# Altium PCB PCB_proj_module_1_1.PcbDoc (part 2 of 9)
Units mm, origin at the board's own origin, x right, y up, seen from the top; angles counter-clockwise.
Board outline 413 x 280 mm, 4 copper layers (Top Layer, Signal Layer 1, Signal Layer 2, Bottom Layer), stack 0.778 mm thick; 1054 components, 639 nets, 3181 pads, 673 vias.
Unrouted connection lines stored in the file: 570.
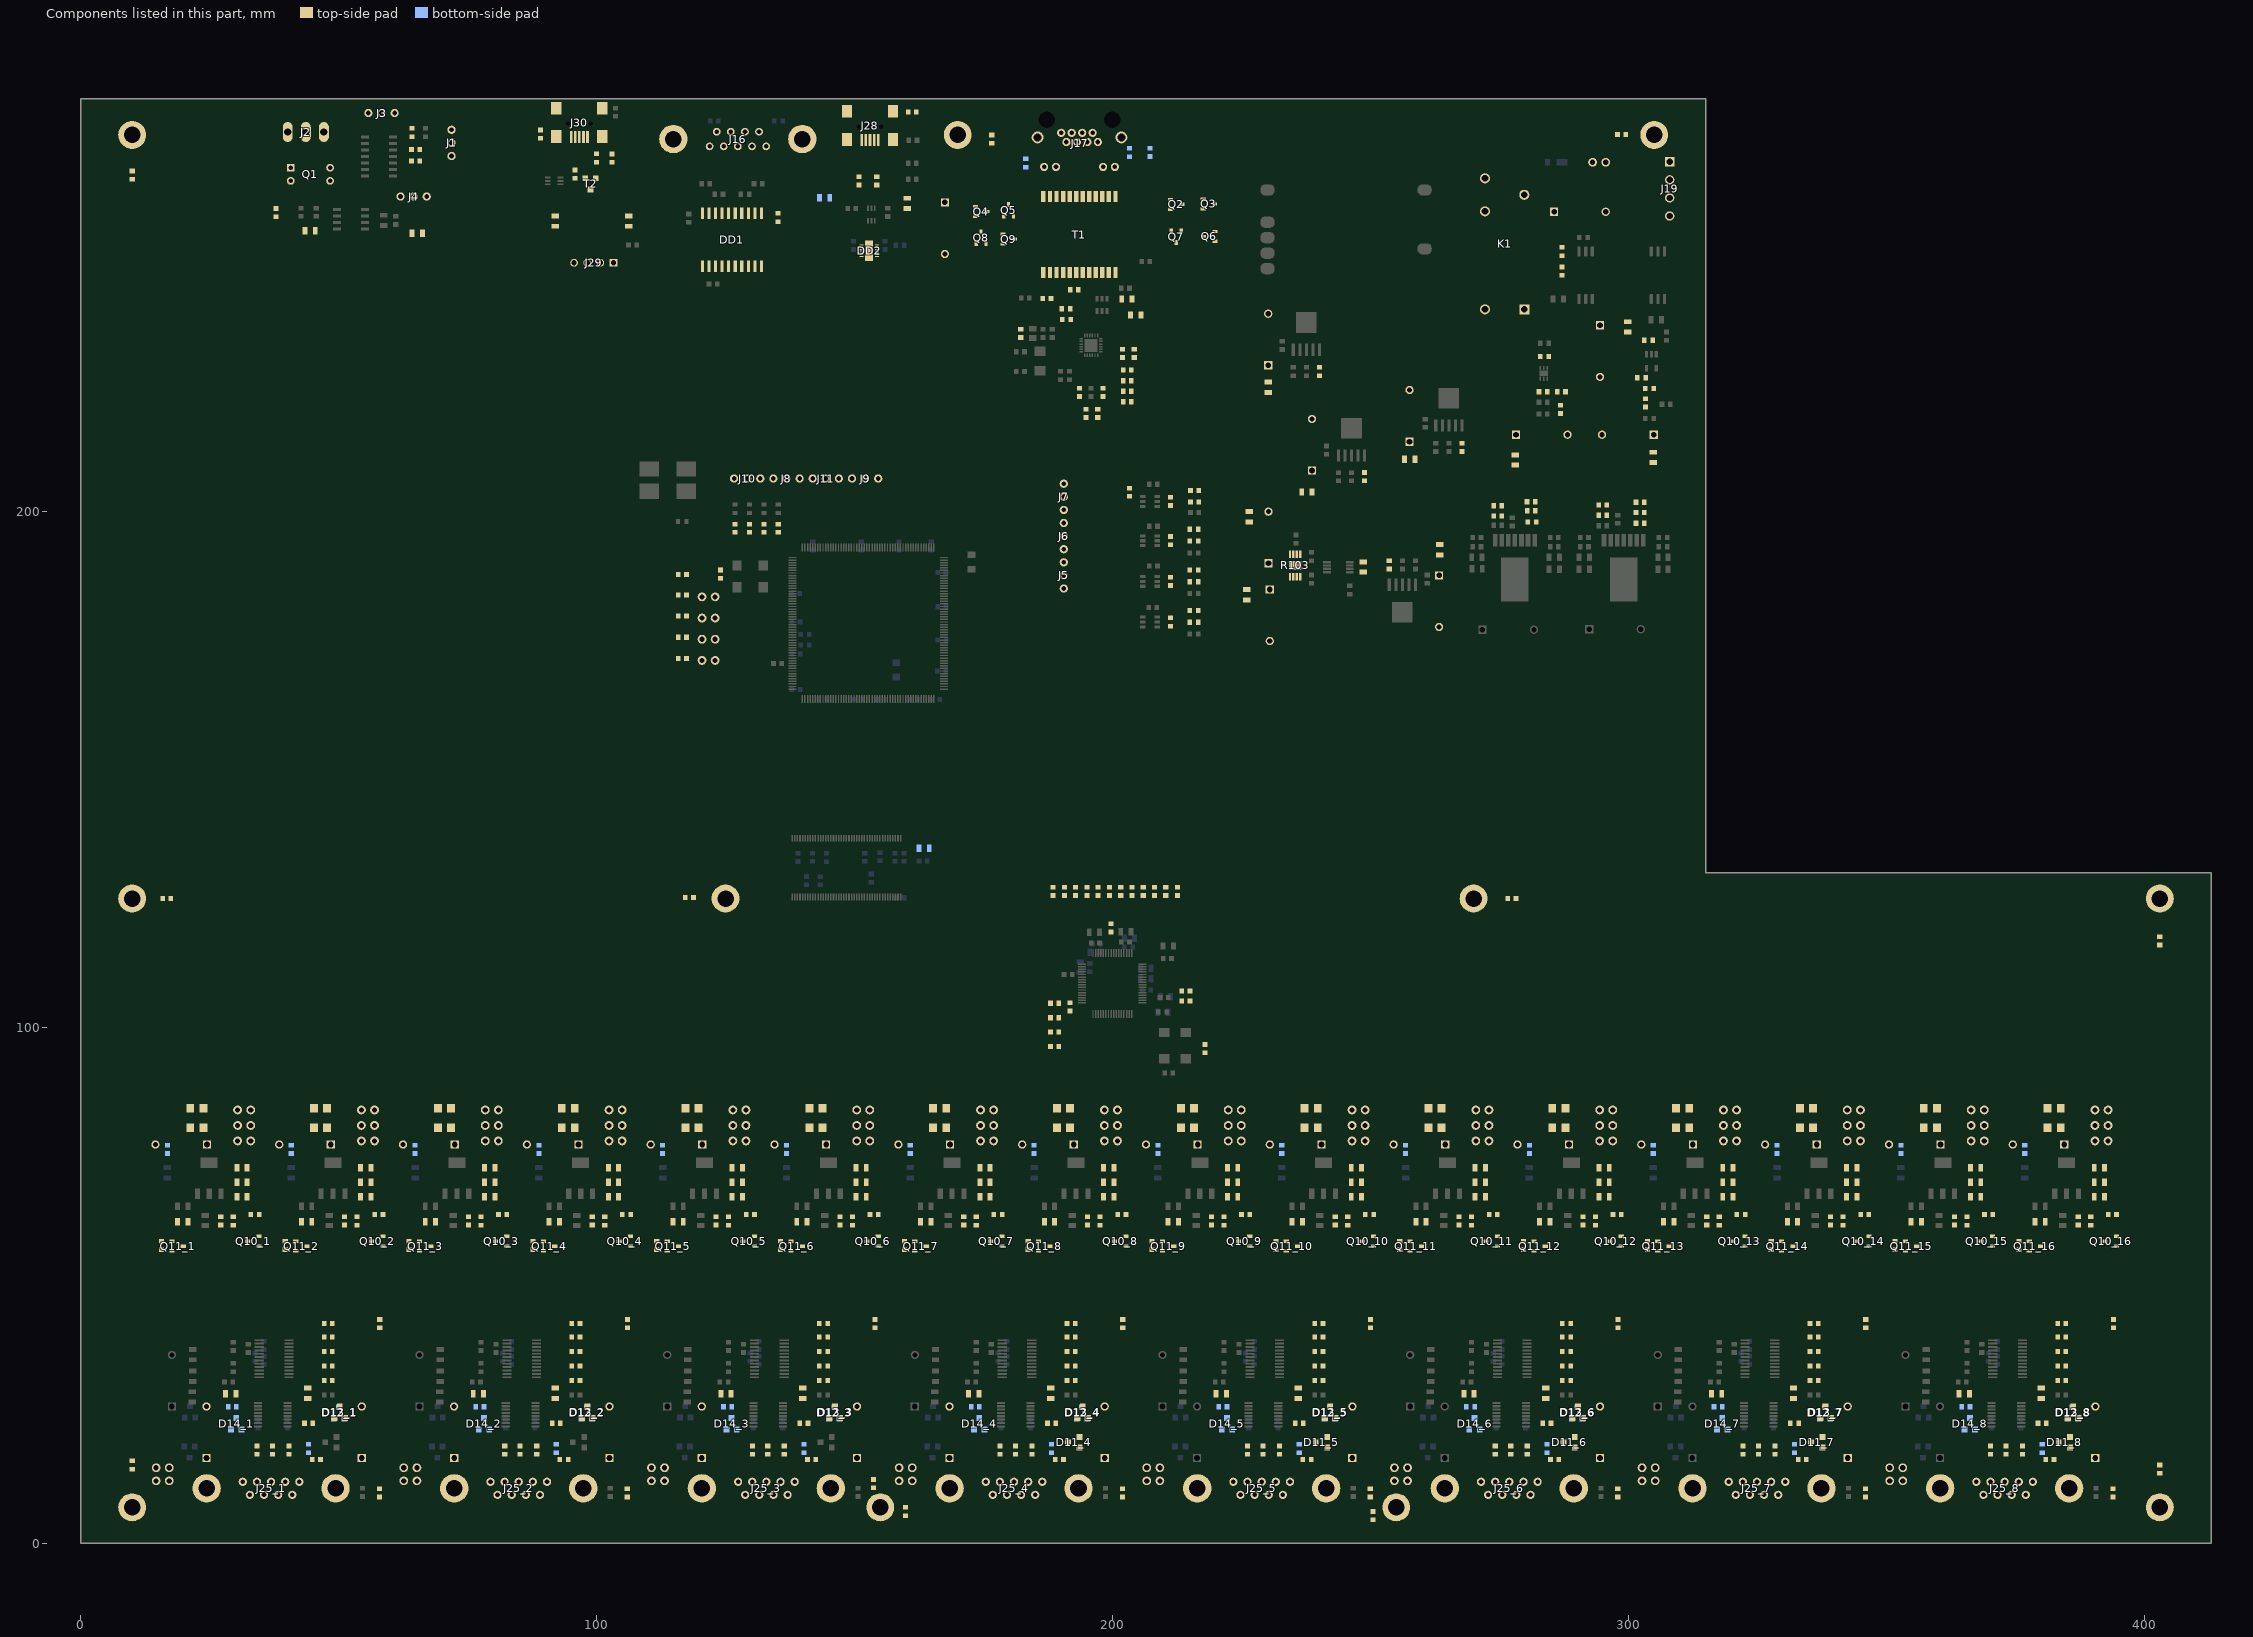
[diagram p4: the components of this part, seen from the top]

## Components (designator, comment, footprint, x,y, rotation, side; value= is the part's Value field where it differs from the comment) (continued)
D11_4 "MMBD1501A" SOT-23 193.61,18.584 r90 top (schematic designator D11)
D11_5 "MMBD1501A" SOT-23 241.61,18.584 r90 top (schematic designator D11)
D11_6 "MMBD1501A" SOT-23 289.61,18.584 r90 top (schematic designator D11)
D11_7 "MMBD1501A" SOT-23 337.61,18.584 r90 top (schematic designator D11)
D11_8 "MMBD1501A" SOT-23 385.61,18.584 r90 top (schematic designator D11)
D12_1 "MMBD1501A" SOT-23 51.116,24.19 r180 bottom (schematic designator D12)
D12_2 "MMBD1501A" SOT-23 99.116,24.19 r180 bottom (schematic designator D12)
D12_3 "MMBD1501A" SOT-23 147.116,24.19 r180 bottom (schematic designator D12)
D12_4 "MMBD1501A" SOT-23 195.116,24.19 r180 bottom (schematic designator D12)
D12_5 "MMBD1501A" SOT-23 243.116,24.19 r180 bottom (schematic designator D12)
D12_6 "MMBD1501A" SOT-23 291.116,24.19 r180 bottom (schematic designator D12)
D12_7 "MMBD1501A" SOT-23 339.116,24.19 r180 bottom (schematic designator D12)
D12_8 "MMBD1501A" SOT-23 387.116,24.19 r180 bottom (schematic designator D12)
D13_1 "MMBD1501A" SOT-23 49.211,24.317 r0 top (schematic designator D13)
D13_2 "MMBD1501A" SOT-23 97.211,24.317 r0 top (schematic designator D13)
D13_3 "MMBD1501A" SOT-23 145.211,24.317 r0 top (schematic designator D13)
D13_4 "MMBD1501A" SOT-23 193.211,24.317 r0 top (schematic designator D13)
D13_5 "MMBD1501A" SOT-23 241.211,24.317 r0 top (schematic designator D13)
D13_6 "MMBD1501A" SOT-23 289.211,24.317 r0 top (schematic designator D13)
D13_7 "MMBD1501A" SOT-23 337.211,24.317 r0 top (schematic designator D13)
D13_8 "MMBD1501A" SOT-23 385.211,24.317 r0 top (schematic designator D13)
D14_1 "MMBD1501A" SOT-23 31.2,22.1 r180 bottom (schematic designator D14)
D14_2 "MMBD1501A" SOT-23 79.2,22.1 r180 bottom (schematic designator D14)
D14_3 "MMBD1501A" SOT-23 127.2,22.1 r180 bottom (schematic designator D14)
D14_4 "MMBD1501A" SOT-23 175.2,22.1 r180 bottom (schematic designator D14)
D14_5 "MMBD1501A" SOT-23 223.2,22.1 r180 bottom (schematic designator D14)
D14_6 "MMBD1501A" SOT-23 271.2,22.1 r180 bottom (schematic designator D14)
D14_7 "MMBD1501A" SOT-23 319.2,22.1 r180 bottom (schematic designator D14)
D14_8 "MMBD1501A" SOT-23 367.2,22.1 r180 bottom (schematic designator D14)
DD1 "ADM3251SOICW20" SOIC127P1032X265-20N 126.246,252.681 r90 top
DD2 "FT234XD" DFN_12-045 152.835,250.572 r180 top
J1 "PLS3" COMATEL_385.0358.1.03.400 71.9,273.991 r270 top
J2 "15EDGRC-3.5-3P" 15EDGRC-3.5-3P-PAK 43.65,276.966 r270 top
J3 "PLS3" COMATEL_385.0358.1.03.400 60.865,277.241 r180 top
J4 "PLS3" COMATEL_385.0358.1.03.400 62.01,261.066 r0 top
J5 "PLS3" COMATEL_385.0358.1.03.400 190.572,185.08 r90 top
J6 "PLS3" COMATEL_385.0358.1.03.400 190.572,192.7 r90 top
J7 "PLS3" COMATEL_385.0358.1.03.400 190.572,200.32 r90 top
J8 "PLS3" COMATEL_385.0358.1.03.400 139.36,206.4 r180 top
J9 "PLS3" COMATEL_385.0358.1.03.400 154.6,206.4 r180 top
J10 "PLS3" COMATEL_385.0358.1.03.400 131.74,206.4 r180 top
J11 "PLS3" COMATEL_385.0358.1.03.400 146.98,206.4 r180 top
J12 "PLS2" SAMTEC_TSW-102-23-L-S 120.446,183.464 r0 top
J13 "PLS2" SAMTEC_TSW-102-23-L-S 120.446,179.359 r0 top
J14 "PLS2" SAMTEC_TSW-102-23-L-S 120.446,175.255 r0 top
J15 "PLS2" SAMTEC_TSW-102-23-L-S 120.446,171.15 r0 top
J16 "Family" TYCO_5747844-5 127.395,272.204 r0 top
J17 "Family" AMPHENOL_RJHSE-5381 193.615,272.514 r0 top
J18 "PLS2" SAMTEC_TSW-102-23-L-S 293.06,267.7 r0 top
J19 "15EDGRC-3.5-04P-14" TE_284512-4 308,262.55 r270 top
J21_1 "12V" SAMTEC_TSW-102-23-L-S 32.97,81.02 r180 top (schematic designator J21)
J21_2 "12V" SAMTEC_TSW-102-23-L-S 56.97,81.02 r180 top (schematic designator J21)
J21_3 "12V" SAMTEC_TSW-102-23-L-S 80.97,81.02 r180 top (schematic designator J21)
J21_4 "12V" SAMTEC_TSW-102-23-L-S 104.97,81.02 r180 top (schematic designator J21)
J21_5 "12V" SAMTEC_TSW-102-23-L-S 128.97,81.02 r180 top (schematic designator J21)
J21_6 "12V" SAMTEC_TSW-102-23-L-S 152.97,81.02 r180 top (schematic designator J21)
J21_7 "12V" SAMTEC_TSW-102-23-L-S 176.97,81.02 r180 top (schematic designator J21)
J21_8 "12V" SAMTEC_TSW-102-23-L-S 200.97,81.02 r180 top (schematic designator J21)
J21_9 "12V" SAMTEC_TSW-102-23-L-S 224.97,81.02 r180 top (schematic designator J21)
J21_10 "12V" SAMTEC_TSW-102-23-L-S 248.97,81.02 r180 top (schematic designator J21)
J21_11 "12V" SAMTEC_TSW-102-23-L-S 272.97,81.02 r180 top (schematic designator J21)
J21_12 "12V" SAMTEC_TSW-102-23-L-S 296.97,81.02 r180 top (schematic designator J21)
J21_13 "12V" SAMTEC_TSW-102-23-L-S 320.97,81.02 r180 top (schematic designator J21)
J21_14 "12V" SAMTEC_TSW-102-23-L-S 344.97,81.02 r180 top (schematic designator J21)
J21_15 "12V" SAMTEC_TSW-102-23-L-S 368.97,81.02 r180 top (schematic designator J21)
J21_16 "12V" SAMTEC_TSW-102-23-L-S 392.97,81.02 r180 top (schematic designator J21)
J22_1 "5V8" SAMTEC_TSW-102-23-L-S 32.97,78.02 r180 top (schematic designator J22)
J22_2 "5V8" SAMTEC_TSW-102-23-L-S 56.97,78.02 r180 top (schematic designator J22)
J22_3 "5V8" SAMTEC_TSW-102-23-L-S 80.97,78.02 r180 top (schematic designator J22)
J22_4 "5V8" SAMTEC_TSW-102-23-L-S 104.97,78.02 r180 top (schematic designator J22)
J22_5 "5V8" SAMTEC_TSW-102-23-L-S 128.97,78.02 r180 top (schematic designator J22)
J22_6 "5V8" SAMTEC_TSW-102-23-L-S 152.97,78.02 r180 top (schematic designator J22)
J22_7 "5V8" SAMTEC_TSW-102-23-L-S 176.97,78.02 r180 top (schematic designator J22)
J22_8 "5V8" SAMTEC_TSW-102-23-L-S 200.97,78.02 r180 top (schematic designator J22)
J22_9 "5V8" SAMTEC_TSW-102-23-L-S 224.97,78.02 r180 top (schematic designator J22)
J22_10 "5V8" SAMTEC_TSW-102-23-L-S 248.97,78.02 r180 top (schematic designator J22)
J22_11 "5V8" SAMTEC_TSW-102-23-L-S 272.97,78.02 r180 top (schematic designator J22)
J22_12 "5V8" SAMTEC_TSW-102-23-L-S 296.97,78.02 r180 top (schematic designator J22)
J22_13 "5V8" SAMTEC_TSW-102-23-L-S 320.97,78.02 r180 top (schematic designator J22)
J22_14 "5V8" SAMTEC_TSW-102-23-L-S 344.97,78.02 r180 top (schematic designator J22)
J22_15 "5V8" SAMTEC_TSW-102-23-L-S 368.97,78.02 r180 top (schematic designator J22)
J22_16 "5V8" SAMTEC_TSW-102-23-L-S 392.97,78.02 r180 top (schematic designator J22)
J24_1 "3V" SAMTEC_TSW-102-23-L-S 32.97,84.02 r180 top (schematic designator J24)
J24_2 "3V" SAMTEC_TSW-102-23-L-S 56.97,84.02 r180 top (schematic designator J24)
J24_3 "3V" SAMTEC_TSW-102-23-L-S 80.97,84.02 r180 top (schematic designator J24)
J24_4 "3V" SAMTEC_TSW-102-23-L-S 104.97,84.02 r180 top (schematic designator J24)
J24_5 "3V" SAMTEC_TSW-102-23-L-S 128.97,84.02 r180 top (schematic designator J24)
J24_6 "3V" SAMTEC_TSW-102-23-L-S 152.97,84.02 r180 top (schematic designator J24)
J24_7 "3V" SAMTEC_TSW-102-23-L-S 176.97,84.02 r180 top (schematic designator J24)
J24_8 "3V" SAMTEC_TSW-102-23-L-S 200.97,84.02 r180 top (schematic designator J24)
J24_9 "3V" SAMTEC_TSW-102-23-L-S 224.97,84.02 r180 top (schematic designator J24)
J24_10 "3V" SAMTEC_TSW-102-23-L-S 248.97,84.02 r180 top (schematic designator J24)
J24_11 "3V" SAMTEC_TSW-102-23-L-S 272.97,84.02 r180 top (schematic designator J24)
J24_12 "3V" SAMTEC_TSW-102-23-L-S 296.97,84.02 r180 top (schematic designator J24)
J24_13 "3V" SAMTEC_TSW-102-23-L-S 320.97,84.02 r180 top (schematic designator J24)
J24_14 "3V" SAMTEC_TSW-102-23-L-S 344.97,84.02 r180 top (schematic designator J24)
J24_15 "3V" SAMTEC_TSW-102-23-L-S 368.97,84.02 r180 top (schematic designator J24)
J24_16 "3V" SAMTEC_TSW-102-23-L-S 392.97,84.02 r180 top (schematic designator J24)
J25_1 "DBR-9M" AMPHENOL_L717DFE09P1ATN 36.922,10.686 r180 top (schematic designator J25)
J25_2 "DBR-9M" AMPHENOL_L717DFE09P1ATN 84.922,10.686 r180 top (schematic designator J25)
J25_3 "DBR-9M" AMPHENOL_L717DFE09P1ATN 132.922,10.686 r180 top (schematic designator J25)
J25_4 "DBR-9M" AMPHENOL_L717DFE09P1ATN 180.922,10.686 r180 top (schematic designator J25)
J25_5 "DBR-9M" AMPHENOL_L717DFE09P1ATN 228.922,10.686 r180 top (schematic designator J25)
J25_6 "DBR-9M" AMPHENOL_L717DFE09P1ATN 276.922,10.686 r180 top (schematic designator J25)
J25_7 "DBR-9M" AMPHENOL_L717DFE09P1ATN 324.922,10.686 r180 top (schematic designator J25)
J25_8 "DBR-9M" AMPHENOL_L717DFE09P1ATN 372.922,10.686 r180 top (schematic designator J25)
J26_1 "PLS2" SAMTEC_TSW-102-23-L-S 17.188,14.676 r270 top (schematic designator J26)
J26_2 "PLS2" SAMTEC_TSW-102-23-L-S 65.188,14.676 r270 top (schematic designator J26)
J26_3 "PLS2" SAMTEC_TSW-102-23-L-S 113.188,14.676 r270 top (schematic designator J26)
J26_4 "PLS2" SAMTEC_TSW-102-23-L-S 161.188,14.676 r270 top (schematic designator J26)
J26_5 "PLS2" SAMTEC_TSW-102-23-L-S 209.188,14.676 r270 top (schematic designator J26)
J26_6 "PLS2" SAMTEC_TSW-102-23-L-S 257.188,14.676 r270 top (schematic designator J26)
J26_7 "PLS2" SAMTEC_TSW-102-23-L-S 305.188,14.676 r270 top (schematic designator J26)
J26_8 "PLS2" SAMTEC_TSW-102-23-L-S 353.188,14.676 r270 top (schematic designator J26)
J27_1 "PLS2" SAMTEC_TSW-102-23-L-S 14.648,12.136 r90 top (schematic designator J27)
J27_2 "PLS2" SAMTEC_TSW-102-23-L-S 62.648,12.136 r90 top (schematic designator J27)
J27_3 "PLS2" SAMTEC_TSW-102-23-L-S 110.648,12.136 r90 top (schematic designator J27)
J27_4 "PLS2" SAMTEC_TSW-102-23-L-S 158.648,12.136 r90 top (schematic designator J27)
J27_5 "PLS2" SAMTEC_TSW-102-23-L-S 206.648,12.136 r90 top (schematic designator J27)
J27_6 "PLS2" SAMTEC_TSW-102-23-L-S 254.648,12.136 r90 top (schematic designator J27)
J27_7 "PLS2" SAMTEC_TSW-102-23-L-S 302.648,12.136 r90 top (schematic designator J27)
J27_8 "PLS2" SAMTEC_TSW-102-23-L-S 350.648,12.136 r90 top (schematic designator J27)
J28 "Разъем 1734035-1" TYCO_1734035-1 153,272 r180 top value=USB_mini
J29 "DS1021-1*4SF11-B" HDR_1X4_2R54_V_M 103.277,248.211 r180 top
J30 "USB_mini" TYCO_1734035-1 96.669,272.578 r180 top
K1 "G6RN-112DC" RELAY_G6RN-1_12DC 279.82,239.2 r90 top
L1 "BLM21" RESC2012X50N 65.25,253.966 r0 top value=1k
L2 "BLM21" RESC2012X50N 44.475,254.471 r0 top value=1k
L3 "BLM21" RESC2012X50N 160.225,259.72 r90 top value=1k
L4 "BLM21" RESC2012X50N 202.8,241.2 r180 top value=1k
L5 "BLM21" RESC2012X50N 204.5,238.1 r0 top value=1k
L7 "BLM21" RESC2012X50N 230.2,224.1 r270 top value=1k
L9 "BLM21" RESC2012X50N 257.6,210.1 r180 top value=1k
L10 "BLM21" RESC2012X50N 237.693,203.794 r180 top value=1k
L11 "BLM21" RESC2012X50N 248.599,189.251 r270 top value=1k
L12 "BLM21" RESC2012X50N 226,183.9 r270 top value=1k
L13 "BLM21" RESC2012X50N 278.1,210 r270 top value=1k
L14 "BLM21" RESC2012X50N 304.8,210.5 r270 top value=1k
L15 "BLM21" RESC2012X50N 263.4,192.6 r90 top value=1k
L16 "BLM21" RESC2012X50N 163.49,134.734 r180 bottom value=1k
L17 "BLM21" RESC2012X50N 106.2,256.3 r90 top value=1k
L18 "BLM21" RESC2012X50N 92,256.3 r270 top value=1k
L19_1 "BLM21" RESC2012X50N 31.288,70.02 r0 top value=1k (schematic designator L19)
L19_2 "BLM21" RESC2012X50N 55.288,70.02 r0 top value=1k (schematic designator L19)
L19_3 "BLM21" RESC2012X50N 79.288,70.02 r0 top value=1k (schematic designator L19)
L19_4 "BLM21" RESC2012X50N 103.288,70.02 r0 top value=1k (schematic designator L19)
L19_5 "BLM21" RESC2012X50N 127.288,70.02 r0 top value=1k (schematic designator L19)
L19_6 "BLM21" RESC2012X50N 151.288,70.02 r0 top value=1k (schematic designator L19)
L19_7 "BLM21" RESC2012X50N 175.288,70.02 r0 top value=1k (schematic designator L19)
L19_8 "BLM21" RESC2012X50N 199.288,70.02 r0 top value=1k (schematic designator L19)
L19_9 "BLM21" RESC2012X50N 223.288,70.02 r0 top value=1k (schematic designator L19)
L19_10 "BLM21" RESC2012X50N 247.288,70.02 r0 top value=1k (schematic designator L19)
L19_11 "BLM21" RESC2012X50N 271.288,70.02 r0 top value=1k (schematic designator L19)
L19_12 "BLM21" RESC2012X50N 295.288,70.02 r0 top value=1k (schematic designator L19)
L19_13 "BLM21" RESC2012X50N 319.288,70.02 r0 top value=1k (schematic designator L19)
L19_14 "BLM21" RESC2012X50N 343.288,70.02 r0 top value=1k (schematic designator L19)
L19_15 "BLM21" RESC2012X50N 367.288,70.02 r0 top value=1k (schematic designator L19)
L19_16 "BLM21" RESC2012X50N 391.288,70.02 r0 top value=1k (schematic designator L19)
L20_1 "BLM21" RESC2012X50N 31.288,72.814 r0 top value=1k (schematic designator L20)
L20_2 "BLM21" RESC2012X50N 55.288,72.814 r0 top value=1k (schematic designator L20)
L20_3 "BLM21" RESC2012X50N 79.288,72.814 r0 top value=1k (schematic designator L20)
L20_4 "BLM21" RESC2012X50N 103.288,72.814 r0 top value=1k (schematic designator L20)
L20_5 "BLM21" RESC2012X50N 127.288,72.814 r0 top value=1k (schematic designator L20)
L20_6 "BLM21" RESC2012X50N 151.288,72.814 r0 top value=1k (schematic designator L20)
L20_7 "BLM21" RESC2012X50N 175.288,72.814 r0 top value=1k (schematic designator L20)
L20_8 "BLM21" RESC2012X50N 199.288,72.814 r0 top value=1k (schematic designator L20)
L20_9 "BLM21" RESC2012X50N 223.288,72.814 r0 top value=1k (schematic designator L20)
L20_10 "BLM21" RESC2012X50N 247.288,72.814 r0 top value=1k (schematic designator L20)
L20_11 "BLM21" RESC2012X50N 271.288,72.814 r0 top value=1k (schematic designator L20)
L20_12 "BLM21" RESC2012X50N 295.288,72.814 r0 top value=1k (schematic designator L20)
L20_13 "BLM21" RESC2012X50N 319.288,72.814 r0 top value=1k (schematic designator L20)
L20_14 "BLM21" RESC2012X50N 343.288,72.814 r0 top value=1k (schematic designator L20)
L20_15 "BLM21" RESC2012X50N 367.288,72.814 r0 top value=1k (schematic designator L20)
L20_16 "BLM21" RESC2012X50N 391.288,72.814 r0 top value=1k (schematic designator L20)
L21_1 "BLM21" RESC2012X50N 31.288,67.226 r0 top value=1k (schematic designator L21)
L21_2 "BLM21" RESC2012X50N 55.288,67.226 r0 top value=1k (schematic designator L21)
L21_3 "BLM21" RESC2012X50N 79.288,67.226 r0 top value=1k (schematic designator L21)
L21_4 "BLM21" RESC2012X50N 103.288,67.226 r0 top value=1k (schematic designator L21)
L21_5 "BLM21" RESC2012X50N 127.288,67.226 r0 top value=1k (schematic designator L21)
L21_6 "BLM21" RESC2012X50N 151.288,67.226 r0 top value=1k (schematic designator L21)
L21_7 "BLM21" RESC2012X50N 175.288,67.226 r0 top value=1k (schematic designator L21)
L21_8 "BLM21" RESC2012X50N 199.288,67.226 r0 top value=1k (schematic designator L21)
L21_9 "BLM21" RESC2012X50N 223.288,67.226 r0 top value=1k (schematic designator L21)
L21_10 "BLM21" RESC2012X50N 247.288,67.226 r0 top value=1k (schematic designator L21)
L21_11 "BLM21" RESC2012X50N 271.288,67.226 r0 top value=1k (schematic designator L21)
L21_12 "BLM21" RESC2012X50N 295.288,67.226 r0 top value=1k (schematic designator L21)
L21_13 "BLM21" RESC2012X50N 319.288,67.226 r0 top value=1k (schematic designator L21)
L21_14 "BLM21" RESC2012X50N 343.288,67.226 r0 top value=1k (schematic designator L21)
L21_15 "BLM21" RESC2012X50N 367.288,67.226 r0 top value=1k (schematic designator L21)
L21_16 "BLM21" RESC2012X50N 391.288,67.226 r0 top value=1k (schematic designator L21)
L22 "BLM21" RESC2012X50N 226.5,199 r270 top value=1k
L24 "BLM21" RESC2012X50N 299.9,235.8 r270 top value=1k
L? "BLM21" RESC2012X50N 144.2,260.8 r180 bottom value=1k
M1 "M3" M3 10,273 r90 top
M2 "M3" M3 170,273 r90 top
M3 "M3" M3 155,7 r90 top
M4 "M3" M3 10,7 r90 top
M5 "M3" M3 403,7 r90 top
M6 "M3" M3 125,125 r90 top
M7 "M3" M3 270,125 r90 top
M8 "M3" M3 403,125 r90 top
M9 "M3" M3 305,273 r90 top
M10 "M3" M3 10,125 r0 top
M11 "M3" M3 255,7 r0 top
PoE1 "OSC_TP" TP2 167.525,259.926 r270 top
Q1 "LTV-817 (DIP-4)" DIP4-300 44.55,265.366 r0 top
Q2 "AO3407A" SOT95P229X119-3N 212.35,259.55 r0 top
Q3 "AO3407A" SOT95P229X119-3N 218.7,259.625 r0 top
Q4 "AO3407A" SOT95P229X119-3N 174.529,258.158 r0 top
Q5 "AO3407A" SOT95P229X119-3N 179.863,258.412 r90 top
Q6 "AO3404A" SOT95P229X119-3N 218.775,253.325 r180 top
Q7 "AO3404A" SOT95P229X119-3N 212.375,253.275 r270 top
Q8 "AO3404A" SOT95P229X119-3N 174.529,253.078 r90 top
Q9 "AO3404A" SOT95P229X119-3N 179.863,252.824 r0 top
Q10_1 "AO3401A" SOT95P229X119-3N 33.5,58.6 r180 top (schematic designator Q10)
Q10_2 "AO3401A" SOT95P229X119-3N 57.5,58.6 r180 top (schematic designator Q10)
Q10_3 "AO3401A" SOT95P229X119-3N 81.5,58.6 r180 top (schematic designator Q10)
Q10_4 "AO3401A" SOT95P229X119-3N 105.5,58.6 r180 top (schematic designator Q10)
Q10_5 "AO3401A" SOT95P229X119-3N 129.5,58.6 r180 top (schematic designator Q10)
Q10_6 "AO3401A" SOT95P229X119-3N 153.5,58.6 r180 top (schematic designator Q10)
Q10_7 "AO3401A" SOT95P229X119-3N 177.5,58.6 r180 top (schematic designator Q10)
Q10_8 "AO3401A" SOT95P229X119-3N 201.5,58.6 r180 top (schematic designator Q10)
Q10_9 "AO3401A" SOT95P229X119-3N 225.5,58.6 r180 top (schematic designator Q10)
Q10_10 "AO3401A" SOT95P229X119-3N 249.5,58.6 r180 top (schematic designator Q10)
Q10_11 "AO3401A" SOT95P229X119-3N 273.5,58.6 r180 top (schematic designator Q10)
Q10_12 "AO3401A" SOT95P229X119-3N 297.5,58.6 r180 top (schematic designator Q10)
Q10_13 "AO3401A" SOT95P229X119-3N 321.5,58.6 r180 top (schematic designator Q10)
Q10_14 "AO3401A" SOT95P229X119-3N 345.5,58.6 r180 top (schematic designator Q10)
Q10_15 "AO3401A" SOT95P229X119-3N 369.5,58.6 r180 top (schematic designator Q10)
Q10_16 "AO3401A" SOT95P229X119-3N 393.5,58.6 r180 top (schematic designator Q10)
Q11_1 "AO3400A" SOT95P229X119-3N 18.794,57.635 r0 top (schematic designator Q11)
Q11_2 "AO3400A" SOT95P229X119-3N 42.794,57.635 r0 top (schematic designator Q11)
Q11_3 "AO3400A" SOT95P229X119-3N 66.794,57.635 r0 top (schematic designator Q11)
Q11_4 "AO3400A" SOT95P229X119-3N 90.794,57.635 r0 top (schematic designator Q11)
Q11_5 "AO3400A" SOT95P229X119-3N 114.794,57.635 r0 top (schematic designator Q11)
Q11_6 "AO3400A" SOT95P229X119-3N 138.794,57.635 r0 top (schematic designator Q11)
Q11_7 "AO3400A" SOT95P229X119-3N 162.794,57.635 r0 top (schematic designator Q11)
Q11_8 "AO3400A" SOT95P229X119-3N 186.794,57.635 r0 top (schematic designator Q11)
Q11_9 "AO3400A" SOT95P229X119-3N 210.794,57.635 r0 top (schematic designator Q11)
Q11_10 "AO3400A" SOT95P229X119-3N 234.794,57.635 r0 top (schematic designator Q11)
Q11_11 "AO3400A" SOT95P229X119-3N 258.794,57.635 r0 top (schematic designator Q11)
Q11_12 "AO3400A" SOT95P229X119-3N 282.794,57.635 r0 top (schematic designator Q11)
Q11_13 "AO3400A" SOT95P229X119-3N 306.794,57.635 r0 top (schematic designator Q11)
Q11_14 "AO3400A" SOT95P229X119-3N 330.794,57.635 r0 top (schematic designator Q11)
Q11_15 "AO3400A" SOT95P229X119-3N 354.794,57.635 r0 top (schematic designator Q11)
Q11_16 "AO3400A" SOT95P229X119-3N 378.794,57.635 r0 top (schematic designator Q11)
R1_1 "RQ73C2B10RBTD 10" RC1206_0805 22.52,84.334 r0 top value=10 (schematic designator R1)
R1_2 "RQ73C2B10RBTD 10" RC1206_0805 46.52,84.334 r0 top value=10 (schematic designator R1)
R1_3 "RQ73C2B10RBTD 10" RC1206_0805 70.52,84.334 r0 top value=10 (schematic designator R1)
R1_4 "RQ73C2B10RBTD 10" RC1206_0805 94.52,84.334 r0 top value=10 (schematic designator R1)
R1_5 "RQ73C2B10RBTD 10" RC1206_0805 118.52,84.334 r0 top value=10 (schematic designator R1)
R1_6 "RQ73C2B10RBTD 10" RC1206_0805 142.52,84.334 r0 top value=10 (schematic designator R1)
R1_7 "RQ73C2B10RBTD 10" RC1206_0805 166.52,84.334 r0 top value=10 (schematic designator R1)
R1_8 "RQ73C2B10RBTD 10" RC1206_0805 190.52,84.334 r0 top value=10 (schematic designator R1)
R1_9 "RQ73C2B10RBTD 10" RC1206_0805 214.52,84.334 r0 top value=10 (schematic designator R1)
R1_10 "RQ73C2B10RBTD 10" RC1206_0805 238.52,84.334 r0 top value=10 (schematic designator R1)
R1_11 "RQ73C2B10RBTD 10" RC1206_0805 262.52,84.334 r0 top value=10 (schematic designator R1)
R1_12 "RQ73C2B10RBTD 10" RC1206_0805 286.52,84.334 r0 top value=10 (schematic designator R1)
R1_13 "RQ73C2B10RBTD 10" RC1206_0805 310.52,84.334 r0 top value=10 (schematic designator R1)
R1_14 "RQ73C2B10RBTD 10" RC1206_0805 334.52,84.334 r0 top value=10 (schematic designator R1)
R1_15 "RQ73C2B10RBTD 10" RC1206_0805 358.52,84.334 r0 top value=10 (schematic designator R1)
R1_16 "RQ73C2B10RBTD 10" RC1206_0805 382.52,84.334 r0 top value=10 (schematic designator R1)
R2_1 "RQ73C2B10RBTD 10" RC1206_0805 22.52,80.584 r0 top value=10 (schematic designator R2)
R2_2 "RQ73C2B10RBTD 10" RC1206_0805 46.52,80.584 r0 top value=10 (schematic designator R2)
R2_3 "RQ73C2B10RBTD 10" RC1206_0805 70.52,80.584 r0 top value=10 (schematic designator R2)
R2_4 "RQ73C2B10RBTD 10" RC1206_0805 94.52,80.584 r0 top value=10 (schematic designator R2)
R2_5 "RQ73C2B10RBTD 10" RC1206_0805 118.52,80.584 r0 top value=10 (schematic designator R2)
R2_6 "RQ73C2B10RBTD 10" RC1206_0805 142.52,80.584 r0 top value=10 (schematic designator R2)
R2_7 "RQ73C2B10RBTD 10" RC1206_0805 166.52,80.584 r0 top value=10 (schematic designator R2)
R2_8 "RQ73C2B10RBTD 10" RC1206_0805 190.52,80.584 r0 top value=10 (schematic designator R2)
R2_9 "RQ73C2B10RBTD 10" RC1206_0805 214.52,80.584 r0 top value=10 (schematic designator R2)
R2_10 "RQ73C2B10RBTD 10" RC1206_0805 238.52,80.584 r0 top value=10 (schematic designator R2)
R2_11 "RQ73C2B10RBTD 10" RC1206_0805 262.52,80.584 r0 top value=10 (schematic designator R2)
R2_12 "RQ73C2B10RBTD 10" RC1206_0805 286.52,80.584 r0 top value=10 (schematic designator R2)
R2_13 "RQ73C2B10RBTD 10" RC1206_0805 310.52,80.584 r0 top value=10 (schematic designator R2)
R2_14 "RQ73C2B10RBTD 10" RC1206_0805 334.52,80.584 r0 top value=10 (schematic designator R2)
R2_15 "RQ73C2B10RBTD 10" RC1206_0805 358.52,80.584 r0 top value=10 (schematic designator R2)
R2_16 "RQ73C2B10RBTD 10" RC1206_0805 382.52,80.584 r0 top value=10 (schematic designator R2)
R3_1 "RQ73C2A49K9BTD 49K9" RESC2012X50N 19.8,62.4 r0 top value=49K9 (schematic designator R3)
R3_2 "RQ73C2A49K9BTD 49K9" RESC2012X50N 43.8,62.4 r0 top value=49K9 (schematic designator R3)
R3_3 "RQ73C2A49K9BTD 49K9" RESC2012X50N 67.8,62.4 r0 top value=49K9 (schematic designator R3)
R3_4 "RQ73C2A49K9BTD 49K9" RESC2012X50N 91.8,62.4 r0 top value=49K9 (schematic designator R3)
R3_5 "RQ73C2A49K9BTD 49K9" RESC2012X50N 115.8,62.4 r0 top value=49K9 (schematic designator R3)
R3_6 "RQ73C2A49K9BTD 49K9" RESC2012X50N 139.8,62.4 r0 top value=49K9 (schematic designator R3)
R3_7 "RQ73C2A49K9BTD 49K9" RESC2012X50N 163.8,62.4 r0 top value=49K9 (schematic designator R3)
R3_8 "RQ73C2A49K9BTD 49K9" RESC2012X50N 187.8,62.4 r0 top value=49K9 (schematic designator R3)
R3_9 "RQ73C2A49K9BTD 49K9" RESC2012X50N 211.8,62.4 r0 top value=49K9 (schematic designator R3)
R3_10 "RQ73C2A49K9BTD 49K9" RESC2012X50N 235.8,62.4 r0 top value=49K9 (schematic designator R3)
R3_11 "RQ73C2A49K9BTD 49K9" RESC2012X50N 259.8,62.4 r0 top value=49K9 (schematic designator R3)
R3_12 "RQ73C2A49K9BTD 49K9" RESC2012X50N 283.8,62.4 r0 top value=49K9 (schematic designator R3)
R3_13 "RQ73C2A49K9BTD 49K9" RESC2012X50N 307.8,62.4 r0 top value=49K9 (schematic designator R3)
R3_14 "RQ73C2A49K9BTD 49K9" RESC2012X50N 331.8,62.4 r0 top value=49K9 (schematic designator R3)
R3_15 "RQ73C2A49K9BTD 49K9" RESC2012X50N 355.8,62.4 r0 top value=49K9 (schematic designator R3)
R3_16 "RQ73C2A49K9BTD 49K9" RESC2012X50N 379.8,62.4 r0 top value=49K9 (schematic designator R3)
R4 "1K SMD0603" 0603R 188.8,96.3 r180 top value=1K
R5 "1K SMD0603" 0603R 188.8,99.1 r180 top value=1K
R6 "1K SMD0603" 0603R 188.8,101.9 r180 top value=1K
R7 "1K SMD0603" 0603R 199.7,119.3 r90 top value=1K
R8 "1K SMD0603" 0603R 191.8,104 r270 top value=1K
R9 "1K SMD0603" 0603R 188.8,104.7 r180 top value=1K
R10 "1K SMD0603" 0603R 214.225,105.125 r0 top value=1K
R11 "1K SMD0603" 0603R 214.218,107.063 r0 top value=1K
R12 "1K SMD0603" 0603R 203.773,126.4 r90 top value=1K
R13 "1K SMD0603" 0603R 201.591,126.4 r90 top value=1K
R14 "1K SMD0603" 0603R 199.409,126.4 r90 top value=1K
R15 "1K SMD0603" 0603R 197.227,126.4 r90 top value=1K
R16 "1K SMD0603" 0603R 195.045,126.4 r90 top value=1K
R17 "1K SMD0603" 0603R 192.864,126.4 r90 top value=1K
R18 "1K SMD0603" 0603R 217.941,95.912 r90 top value=1K
R19 "1K SMD0603" 0603R 190.682,126.4 r90 top value=1K
R20 "1K SMD0603" 0603R 188.5,126.4 r90 top value=1K
R21 "1K SMD0603" 0603R 205.955,126.4 r90 top value=1K
R22 "1K SMD0603" 0603R 208.136,126.4 r90 top value=1K
R23 "1K SMD0603" 0603R 210.318,126.4 r90 top value=1K
R24 "1K SMD0603" 0603R 212.6,126.4 r90 top value=1K
R25 "8K2 SMD0603" 0603R 37.9,257.946 r270 top value=8K2
R26 "8K2 SMD0603" 0603R 64.25,273.466 r270 top value=8K2
R27 "10K SMD0603" 0603R 64.95,267.966 r0 top value=10K
R28 "10K SMD0603" 0603R 64.95,270.166 r0 top value=10K
R29 "10K SMD0603" 0603R 116.65,187.775 r180 top value=10K
R30 "100K SMD0603" 0603R 203.311,203.738 r90 top value=100K
R31 "100K SMD0603" 0603R 211.236,201.97 r270 top value=100K
R32 "8K2 SMD0603" 0603R 124.05,187.875 r90 top value=8K2
R33 "43K SMD0603" 0603R 215.936,204.063 r0 top value=43K
R34 "1K SMD0603" 0603R 135.237,196.775 r270 top value=1K
R35 "1K SMD0603" 0603R 132.443,196.775 r270 top value=1K
R36 "4K3 SMD0603" 0603R 215.936,201.888 r180 top value=4K3
R37 "1K SMD0603" 0603R 129.649,196.775 r270 top value=1K
R38 "1K SMD0603" 0603R 126.855,196.775 r270 top value=1K
R39 "1K SMD0603" 0603R 211.236,194.363 r270 top value=1K
R40 "30K SMD0603" 0603R 215.812,196.57 r0 top value=30K
R41 "1K SMD0603" 0603R 116.65,183.84 r180 top value=1K
R42 "4K3 SMD0603" 0603R 215.812,194.284 r180 top value=4K3
R43 "1K SMD0603" 0603R 211.236,186.476 r270 top value=1K
R44 "1K SMD0603" 0603R 116.65,179.736 r180 top value=1K
R45 "30K SMD0603" 0603R 215.812,188.696 r0 top value=30K
R46 "4K3 SMD0603" 0603R 215.812,186.41 r180 top value=4K3
R47 "1K SMD0603" 0603R 116.65,175.631 r180 top value=1K
R48 "1K SMD0603" 0603R 211.236,178.602 r270 top value=1K
R49 "30K SMD0603" 0603R 215.812,180.822 r0 top value=30K
R50 "1K SMD0603" 0603R 116.65,171.526 r180 top value=1K
R51 "4K3 SMD0603" 0603R 215.812,178.536 r180 top value=4K3
R52 "100nF SMD0603" 0603C 150.867,264.108 r90 top value=100nF
R53 "100nF SMD0603" 0603C 154.3,264.1 r90 top value=100nF
R54 "1K SMD0603" 0603R 118,125.2 r0 top value=1K
R55 "100nF SMD0603" 0603C 135.2,257 r270 top value=100nF
R56 "100nF SMD0603" 0603C 161.204,277.473 r180 top value=100nF
R57 "1K SMD0603" 0603R 202.857,225.364 r0 top value=1K
R58 "1K SMD0603" 0603R 202.857,223.332 r0 top value=1K
R59 "1K SMD0603" 0603R 202.857,221.3 r0 top value=1K
R60 "1К SMD0603" 0603R 191,239.3 r180 top value=1К
R61 "1К SMD0603" 0603R 192.6,243 r0 top value=1К
R62 "1К SMD0603" 0603R 191.1,237.2 r180 top value=1К
R63 "1К SMD0603" 0603R 187.3,241.3 r180 top value=1К
R64 "33 SMD0603" 0603R 194.851,219.042 r90 top value=33
R65 "33 SMD0603" 0603R 193.579,223.106 r90 top value=33
R66 "10K SMD0603" 0603R 197.136,219.042 r90 top value=10K
R67 "33 SMD0603" 0603R 198.151,223.106 r90 top value=33
R68 "100nF SMD0603" 0603C 182.225,234.536 r270 top value=100nF
R69 "1K5" 0603R 202.857,227.424 r0 top
R70 "10K SMD0603" 0603R 204.223,230.672 r90 top value=10K
R71 "33 SMD0603" 0603R 201.937,230.672 r90 top value=33
R72 "100nF SMD0603" 0603C 203.269,269.588 r270 bottom value=100nF
R73 "100nF SMD0603" 0603C 207.25,269.625 r270 bottom value=100nF
R74 "100nF SMD0603" 0603C 183.203,267.556 r270 bottom value=100nF
R75 "1K SMD0603" 0603R 281.306,198.004 r0 top value=1K
R76 "8K2 SMD0603" 0603R 281.175,200.15 r180 top value=8K2
R77 "51K SMD0603" 0603R 274.668,199.122 r0 top value=51K
R78 "2K2 SMD0603" 0603R 281.15,201.9 r180 top value=2K2
R79 "8K2 SMD0603" 0603R 274.668,201.12 r0 top value=8K2
R80 "100K SMD0603" 0603R 287.1,246.6 r270 top value=100K
R81 "51K SMD0603" 0603R 287.1,250.4 r270 top value=51K
R82 "1K SMD0603" 0603R 10,265.2 r90 top value=1K
R83 "1K SMD0603" 0603R 277.4,125 r180 top value=1K
R84 "1K SMD0603" 0603R 176.6,272.2 r90 top value=1K
R85 "1K SMD0603" 0603R 240.133,227.148 r90 top value=1K
R86 "1K SMD0603" 0603R 403,116.8 r90 top value=1K
R87 "1K SMD0603" 0603R 159.9,6.2 r90 top value=1K
R88 "1K SMD0603" 0603R 298.7,273.1 r0 top value=1K
R89 "1K SMD0603" 0603R 10,15.2 r270 top value=1K
R90 "1K SMD0603" 0603R 267.731,212.448 r90 top value=1K
R91 "1K SMD0603" 0603R 403,14.4 r270 top value=1K
R92 "1K SMD0603" 0603R 16.7,125 r180 top value=1K
R93 "1K SMD0603" 0603R 302.268,197.75 r0 top value=1K
R94 "8K2 SMD0603" 0603R 302.275,199.8 r180 top value=8K2
R95 "24K SMD0603" 0603R 295.018,199.274 r0 top value=24K
R96 "2K2 SMD0603" 0603R 302.275,201.8 r180 top value=2K2
R97 "8K2 SMD0603" 0603R 295.018,201.306 r0 top value=8K2
R98 "1K SMD0603" 0603R 248.869,206.786 r90 top value=1K
R99 "1K2 SMD0603" 0603R 286.999,223.236 r180 top value=1K2
R100 "1K SMD0603" 0603R 286.844,219.808 r270 top value=1K
R101 "1K SMD0603" 0603R 283.735,230.078 r0 top value=1K
R102 "6K8 SMD0603" 0603R 283.481,223.236 r180 top value=6K8
R103 "LT5400-6" SOP65P488X110-9N-R178X241 235.396,189.565 r270 top value=-6
R104 "1K SMD0603" 0603R 303.9,233.2 r180 top value=1K
R105 "6K8 SMD0603" 0603R 304.092,223.854 r0 top value=6K8
R106 "1K SMD0603" 0603R 303.33,221.06 r270 top value=1K
R107 "1K2 SMD0603" 0603R 302.544,225.941 r0 top value=1K2
R108 "1K SMD0603" 0603R 253.656,189.664 r270 top value=1K
R109 "1K SMD0603" 0603R 103,268.5 r90 top value=1K
R110 "1K SMD0603" 0603R 100.025,268.525 r270 top value=1K
R111 "1K SMD0603" 0603R 95.8,265.4 r270 top value=1K
R112 "1K SMD0603" 0603R 89.161,273.16 r270 top value=1K
R113_1 "1K SMD0603" 0603R 27.18,62.52 r270 top value=1K (schematic designator R113)
R113_2 "1K SMD0603" 0603R 51.18,62.52 r270 top value=1K (schematic designator R113)
R113_3 "1K SMD0603" 0603R 75.18,62.52 r270 top value=1K (schematic designator R113)
R113_4 "1K SMD0603" 0603R 99.18,62.52 r270 top value=1K (schematic designator R113)
R113_5 "1K SMD0603" 0603R 123.18,62.52 r270 top value=1K (schematic designator R113)
R113_6 "1K SMD0603" 0603R 147.18,62.52 r270 top value=1K (schematic designator R113)
R113_7 "1K SMD0603" 0603R 171.18,62.52 r270 top value=1K (schematic designator R113)
R113_8 "1K SMD0603" 0603R 195.18,62.52 r270 top value=1K (schematic designator R113)
R113_9 "1K SMD0603" 0603R 219.18,62.52 r270 top value=1K (schematic designator R113)
R113_10 "1K SMD0603" 0603R 243.18,62.52 r270 top value=1K (schematic designator R113)
R113_11 "1K SMD0603" 0603R 267.18,62.52 r270 top value=1K (schematic designator R113)
R113_12 "1K SMD0603" 0603R 291.18,62.52 r270 top value=1K (schematic designator R113)
R113_13 "1K SMD0603" 0603R 315.18,62.52 r270 top value=1K (schematic designator R113)
R113_14 "1K SMD0603" 0603R 339.18,62.52 r270 top value=1K (schematic designator R113)
R113_15 "1K SMD0603" 0603R 363.18,62.52 r270 top value=1K (schematic designator R113)
R113_16 "1K SMD0603" 0603R 387.18,62.52 r270 top value=1K (schematic designator R113)
R114_1 "1K SMD0603" 0603R 33.814,63.746 r0 top value=1K (schematic designator R114)
R114_2 "1K SMD0603" 0603R 57.814,63.746 r0 top value=1K (schematic designator R114)
R114_3 "1K SMD0603" 0603R 81.814,63.746 r0 top value=1K (schematic designator R114)
R114_4 "1K SMD0603" 0603R 105.814,63.746 r0 top value=1K (schematic designator R114)
R114_5 "1K SMD0603" 0603R 129.814,63.746 r0 top value=1K (schematic designator R114)
R114_6 "1K SMD0603" 0603R 153.814,63.746 r0 top value=1K (schematic designator R114)
R114_7 "1K SMD0603" 0603R 177.814,63.746 r0 top value=1K (schematic designator R114)
R114_8 "1K SMD0603" 0603R 201.814,63.746 r0 top value=1K (schematic designator R114)
R114_9 "1K SMD0603" 0603R 225.814,63.746 r0 top value=1K (schematic designator R114)
R114_10 "1K SMD0603" 0603R 249.814,63.746 r0 top value=1K (schematic designator R114)
R114_11 "1K SMD0603" 0603R 273.814,63.746 r0 top value=1K (schematic designator R114)
R114_12 "1K SMD0603" 0603R 297.814,63.746 r0 top value=1K (schematic designator R114)
R114_13 "1K SMD0603" 0603R 321.814,63.746 r0 top value=1K (schematic designator R114)
R114_14 "1K SMD0603" 0603R 345.814,63.746 r0 top value=1K (schematic designator R114)
R114_15 "1K SMD0603" 0603R 369.814,63.746 r0 top value=1K (schematic designator R114)
R114_16 "1K SMD0603" 0603R 393.814,63.746 r0 top value=1K (schematic designator R114)
R115_1 "1K SMD0603" 0603R 29.6,62.5 r90 top value=1K (schematic designator R115)
R115_2 "1K SMD0603" 0603R 53.6,62.5 r90 top value=1K (schematic designator R115)
R115_3 "1K SMD0603" 0603R 77.6,62.5 r90 top value=1K (schematic designator R115)
R115_4 "1K SMD0603" 0603R 101.6,62.5 r90 top value=1K (schematic designator R115)
R115_5 "1K SMD0603" 0603R 125.6,62.5 r90 top value=1K (schematic designator R115)
R115_6 "1K SMD0603" 0603R 149.6,62.5 r90 top value=1K (schematic designator R115)
R115_7 "1K SMD0603" 0603R 173.6,62.5 r90 top value=1K (schematic designator R115)
R115_8 "1K SMD0603" 0603R 197.6,62.5 r90 top value=1K (schematic designator R115)
R115_9 "1K SMD0603" 0603R 221.6,62.5 r90 top value=1K (schematic designator R115)
R115_10 "1K SMD0603" 0603R 245.6,62.5 r90 top value=1K (schematic designator R115)
R115_11 "1K SMD0603" 0603R 269.6,62.5 r90 top value=1K (schematic designator R115)
R115_12 "1K SMD0603" 0603R 293.6,62.5 r90 top value=1K (schematic designator R115)
R115_13 "1K SMD0603" 0603R 317.6,62.5 r90 top value=1K (schematic designator R115)
R115_14 "1K SMD0603" 0603R 341.6,62.5 r90 top value=1K (schematic designator R115)
R115_15 "1K SMD0603" 0603R 365.6,62.5 r90 top value=1K (schematic designator R115)
R115_16 "1K SMD0603" 0603R 389.6,62.5 r90 top value=1K (schematic designator R115)
R116_1 "1K SMD0603" 0603R 15.68,57.77 r90 top value=1K (schematic designator R116)
R116_2 "1K SMD0603" 0603R 39.68,57.77 r90 top value=1K (schematic designator R116)
R116_3 "1K SMD0603" 0603R 63.68,57.77 r90 top value=1K (schematic designator R116)
R116_4 "1K SMD0603" 0603R 87.68,57.77 r90 top value=1K (schematic designator R116)
R116_5 "1K SMD0603" 0603R 111.68,57.77 r90 top value=1K (schematic designator R116)
R116_6 "1K SMD0603" 0603R 135.68,57.77 r90 top value=1K (schematic designator R116)
R116_7 "1K SMD0603" 0603R 159.68,57.77 r90 top value=1K (schematic designator R116)
R116_8 "1K SMD0603" 0603R 183.68,57.77 r90 top value=1K (schematic designator R116)
R116_9 "1K SMD0603" 0603R 207.68,57.77 r90 top value=1K (schematic designator R116)
R116_10 "1K SMD0603" 0603R 231.68,57.77 r90 top value=1K (schematic designator R116)
R116_11 "1K SMD0603" 0603R 255.68,57.77 r90 top value=1K (schematic designator R116)
R116_12 "1K SMD0603" 0603R 279.68,57.77 r90 top value=1K (schematic designator R116)
R116_13 "1K SMD0603" 0603R 303.68,57.77 r90 top value=1K (schematic designator R116)
R116_14 "1K SMD0603" 0603R 327.68,57.77 r90 top value=1K (schematic designator R116)
R116_15 "1K SMD0603" 0603R 351.68,57.77 r90 top value=1K (schematic designator R116)
R116_16 "1K SMD0603" 0603R 375.68,57.77 r90 top value=1K (schematic designator R116)
R117_1 "10K SMD0603" 0603R 16.82,76.37 r90 bottom value=10K (schematic designator R117)
R117_2 "10K SMD0603" 0603R 40.82,76.37 r90 bottom value=10K (schematic designator R117)
R117_3 "10K SMD0603" 0603R 64.82,76.37 r90 bottom value=10K (schematic designator R117)
R117_4 "10K SMD0603" 0603R 88.82,76.37 r90 bottom value=10K (schematic designator R117)
R117_5 "10K SMD0603" 0603R 112.82,76.37 r90 bottom value=10K (schematic designator R117)
R117_6 "10K SMD0603" 0603R 136.82,76.37 r90 bottom value=10K (schematic designator R117)
R117_7 "10K SMD0603" 0603R 160.82,76.37 r90 bottom value=10K (schematic designator R117)
R117_8 "10K SMD0603" 0603R 184.82,76.37 r90 bottom value=10K (schematic designator R117)
R117_9 "10K SMD0603" 0603R 208.82,76.37 r90 bottom value=10K (schematic designator R117)
R117_10 "10K SMD0603" 0603R 232.82,76.37 r90 bottom value=10K (schematic designator R117)
R117_11 "10K SMD0603" 0603R 256.82,76.37 r90 bottom value=10K (schematic designator R117)
R117_12 "10K SMD0603" 0603R 280.82,76.37 r90 bottom value=10K (schematic designator R117)
R117_13 "10K SMD0603" 0603R 304.82,76.37 r90 bottom value=10K (schematic designator R117)
R117_14 "10K SMD0603" 0603R 328.82,76.37 r90 bottom value=10K (schematic designator R117)
R117_15 "10K SMD0603" 0603R 352.82,76.37 r90 bottom value=10K (schematic designator R117)
R117_16 "10K SMD0603" 0603R 376.82,76.37 r90 bottom value=10K (schematic designator R117)
R118_1 "1K SMD0603" 0603R 37.2,18.1 r90 top value=1K (schematic designator R118)
R118_2 "1K SMD0603" 0603R 85.2,18.1 r90 top value=1K (schematic designator R118)
R118_3 "1K SMD0603" 0603R 133.2,18.1 r90 top value=1K (schematic designator R118)
R118_4 "1K SMD0603" 0603R 181.2,18.1 r90 top value=1K (schematic designator R118)
R118_5 "1K SMD0603" 0603R 229.2,18.1 r90 top value=1K (schematic designator R118)
R118_6 "1K SMD0603" 0603R 277.2,18.1 r90 top value=1K (schematic designator R118)
R118_7 "1K SMD0603" 0603R 325.2,18.1 r90 top value=1K (schematic designator R118)
R118_8 "1K SMD0603" 0603R 373.2,18.1 r90 top value=1K (schematic designator R118)
R119_1 "1K SMD0603" 0603R 34.2,18.1 r90 top value=1K (schematic designator R119)
R119_2 "1K SMD0603" 0603R 82.2,18.1 r90 top value=1K (schematic designator R119)
R119_3 "1K SMD0603" 0603R 130.2,18.1 r90 top value=1K (schematic designator R119)
R119_4 "1K SMD0603" 0603R 178.2,18.1 r90 top value=1K (schematic designator R119)
R119_5 "1K SMD0603" 0603R 226.2,18.1 r90 top value=1K (schematic designator R119)
R119_6 "1K SMD0603" 0603R 274.2,18.1 r90 top value=1K (schematic designator R119)
R119_7 "1K SMD0603" 0603R 322.2,18.1 r90 top value=1K (schematic designator R119)
R119_8 "1K SMD0603" 0603R 370.2,18.1 r90 top value=1K (schematic designator R119)
R120_1 "1K SMD0603" 0603R 57.95,9.81 r90 top value=1K (schematic designator R120)
R120_2 "1K SMD0603" 0603R 105.95,9.81 r90 top value=1K (schematic designator R120)
R120_3 "1K SMD0603" 0603R 153.7,11.6 r270 top value=1K (schematic designator R120)
R120_4 "1K SMD0603" 0603R 201.95,9.81 r90 top value=1K (schematic designator R120)
R120_5 "1K SMD0603" 0603R 249.95,9.81 r90 top value=1K (schematic designator R120)
R120_6 "1K SMD0603" 0603R 297.95,9.81 r90 top value=1K (schematic designator R120)
R120_7 "1K SMD0603" 0603R 345.95,9.81 r90 top value=1K (schematic designator R120)
R120_8 "1K SMD0603" 0603R 393.95,9.81 r90 top value=1K (schematic designator R120)
R121_1 "1K SMD0603" 0603R 48,31.6 r180 top value=1K (schematic designator R121)
R121_2 "1K SMD0603" 0603R 96,31.6 r180 top value=1K (schematic designator R121)
R121_3 "1K SMD0603" 0603R 144,31.6 r180 top value=1K (schematic designator R121)
R121_4 "1K SMD0603" 0603R 192,31.6 r180 top value=1K (schematic designator R121)
R121_5 "1K SMD0603" 0603R 240,31.6 r180 top value=1K (schematic designator R121)
R121_6 "1K SMD0603" 0603R 288,31.6 r180 top value=1K (schematic designator R121)
R121_7 "1K SMD0603" 0603R 336,31.6 r180 top value=1K (schematic designator R121)
R121_8 "1K SMD0603" 0603R 384,31.6 r180 top value=1K (schematic designator R121)
R122_1 "1K SMD0603" 0603R 48,34.4 r180 top value=1K (schematic designator R122)
R122_2 "1K SMD0603" 0603R 96,34.4 r180 top value=1K (schematic designator R122)
R122_3 "1K SMD0603" 0603R 144,34.4 r180 top value=1K (schematic designator R122)
R122_4 "1K SMD0603" 0603R 192,34.4 r180 top value=1K (schematic designator R122)
R122_5 "1K SMD0603" 0603R 240,34.4 r180 top value=1K (schematic designator R122)
R122_6 "1K SMD0603" 0603R 288,34.4 r180 top value=1K (schematic designator R122)
R122_7 "1K SMD0603" 0603R 336,34.4 r180 top value=1K (schematic designator R122)
R122_8 "1K SMD0603" 0603R 384,34.4 r180 top value=1K (schematic designator R122)
R123_1 "560K SMD0603" 0603R 44.2,23.3 r0 top value=560K (schematic designator R123)
R123_2 "560K SMD0603" 0603R 92.2,23.3 r0 top value=560K (schematic designator R123)
R123_3 "560K SMD0603" 0603R 140.2,23.3 r0 top value=560K (schematic designator R123)
R123_4 "560K SMD0603" 0603R 188.2,23.3 r0 top value=560K (schematic designator R123)
R123_5 "560K SMD0603" 0603R 236.2,23.3 r0 top value=560K (schematic designator R123)
R123_6 "560K SMD0603" 0603R 284.2,23.3 r0 top value=560K (schematic designator R123)
R123_7 "560K SMD0603" 0603R 332.2,23.3 r0 top value=560K (schematic designator R123)
R123_8 "560K SMD0603" 0603R 380.2,23.3 r0 top value=560K (schematic designator R123)
R124_1 "1K SMD0603" 0603R 48,37.2 r180 top value=1K (schematic designator R124)
R124_2 "1K SMD0603" 0603R 96,37.2 r180 top value=1K (schematic designator R124)
R124_3 "1K SMD0603" 0603R 144,37.2 r180 top value=1K (schematic designator R124)
R124_4 "1K SMD0603" 0603R 192,37.2 r180 top value=1K (schematic designator R124)
R124_5 "1K SMD0603" 0603R 240,37.2 r180 top value=1K (schematic designator R124)
R124_6 "1K SMD0603" 0603R 288,37.2 r180 top value=1K (schematic designator R124)
R124_7 "1K SMD0603" 0603R 336,37.2 r180 top value=1K (schematic designator R124)
R124_8 "1K SMD0603" 0603R 384,37.2 r180 top value=1K (schematic designator R124)
R125_1 "1K SMD0603" 0603R 48,40 r180 top value=1K (schematic designator R125)
R125_2 "1K SMD0603" 0603R 96,40 r180 top value=1K (schematic designator R125)
R125_3 "1K SMD0603" 0603R 144,40 r180 top value=1K (schematic designator R125)
R125_4 "1K SMD0603" 0603R 192,40 r180 top value=1K (schematic designator R125)
R125_5 "1K SMD0603" 0603R 240,40 r180 top value=1K (schematic designator R125)
R125_6 "1K SMD0603" 0603R 288,40 r180 top value=1K (schematic designator R125)
R125_7 "1K SMD0603" 0603R 336,40 r180 top value=1K (schematic designator R125)
R125_8 "1K SMD0603" 0603R 384,40 r180 top value=1K (schematic designator R125)
R126_1 "1K SMD0603" 0603R 48,42.6 r0 top value=1K (schematic designator R126)
R126_2 "1K SMD0603" 0603R 96,42.6 r0 top value=1K (schematic designator R126)
R126_3 "1K SMD0603" 0603R 144,42.6 r0 top value=1K (schematic designator R126)
R126_4 "1K SMD0603" 0603R 192,42.6 r0 top value=1K (schematic designator R126)
R126_5 "1K SMD0603" 0603R 240,42.6 r0 top value=1K (schematic designator R126)
R126_6 "1K SMD0603" 0603R 288,42.6 r0 top value=1K (schematic designator R126)
R126_7 "1K SMD0603" 0603R 336,42.6 r0 top value=1K (schematic designator R126)
R126_8 "1K SMD0603" 0603R 384,42.6 r0 top value=1K (schematic designator R126)
R127 "1K SMD0603" 0603R 250.5,5.4 r90 top value=1K
R128_1 "1K SMD0603" 0603R 45.7,16.3 r0 top value=1K (schematic designator R128)
R128_2 "1K SMD0603" 0603R 93.7,16.3 r0 top value=1K (schematic designator R128)
R128_3 "1K SMD0603" 0603R 141.7,16.3 r0 top value=1K (schematic designator R128)
R128_4 "1K SMD0603" 0603R 189.7,16.3 r0 top value=1K (schematic designator R128)
R128_5 "1K SMD0603" 0603R 237.7,16.3 r0 top value=1K (schematic designator R128)
R128_6 "1K SMD0603" 0603R 285.7,16.3 r0 top value=1K (schematic designator R128)
R128_7 "1K SMD0603" 0603R 333.7,16.3 r0 top value=1K (schematic designator R128)
R128_8 "1K SMD0603" 0603R 381.7,16.3 r0 top value=1K (schematic designator R128)
R129_1 "240K SMD0603" 0603R 40.4,18.1 r90 top value=240K (schematic designator R129)
R129_2 "240K SMD0603" 0603R 88.4,18.1 r90 top value=240K (schematic designator R129)
R129_3 "240K SMD0603" 0603R 136.4,18.1 r90 top value=240K (schematic designator R129)
R129_4 "240K SMD0603" 0603R 184.4,18.1 r90 top value=240K (schematic designator R129)
R129_5 "240K SMD0603" 0603R 232.4,18.1 r90 top value=240K (schematic designator R129)
R129_6 "240K SMD0603" 0603R 280.4,18.1 r90 top value=240K (schematic designator R129)
R129_7 "240K SMD0603" 0603R 328.4,18.1 r90 top value=240K (schematic designator R129)
R129_8 "240K SMD0603" 0603R 376.4,18.1 r90 top value=240K (schematic designator R129)
R130_1 "1K SMD0603" 0603R 44.2,18.4 r90 bottom value=1K (schematic designator R130)
R130_2 "1K SMD0603" 0603R 92.2,18.4 r90 bottom value=1K (schematic designator R130)
R130_3 "1K SMD0603" 0603R 140.2,18.4 r90 bottom value=1K (schematic designator R130)
R130_4 "1K SMD0603" 0603R 188.2,18.4 r90 bottom value=1K (schematic designator R130)
R130_5 "1K SMD0603" 0603R 236.2,18.4 r90 bottom value=1K (schematic designator R130)
R130_6 "1K SMD0603" 0603R 284.2,18.4 r90 bottom value=1K (schematic designator R130)
R130_7 "1K SMD0603" 0603R 332.2,18.4 r90 bottom value=1K (schematic designator R130)
R130_8 "1K SMD0603" 0603R 380.2,18.4 r90 bottom value=1K (schematic designator R130)
R131_1 "1K SMD0603" 0603R 58,42.6 r270 top value=1K (schematic designator R131)
R131_2 "1K SMD0603" 0603R 106,42.6 r270 top value=1K (schematic designator R131)
R131_3 "1K SMD0603" 0603R 154,42.6 r270 top value=1K (schematic designator R131)
R131_4 "1K SMD0603" 0603R 202,42.6 r270 top value=1K (schematic designator R131)
R131_5 "1K SMD0603" 0603R 250,42.6 r270 top value=1K (schematic designator R131)
R131_6 "1K SMD0603" 0603R 298,42.6 r270 top value=1K (schematic designator R131)
R131_7 "1K SMD0603" 0603R 346,42.6 r270 top value=1K (schematic designator R131)
R131_8 "1K SMD0603" 0603R 394,42.6 r270 top value=1K (schematic designator R131)
R132_1 "1K SMD0603" 0603R 29.4,26.5 r0 bottom value=1K (schematic designator R132)
R132_2 "1K SMD0603" 0603R 77.4,26.5 r0 bottom value=1K (schematic designator R132)
R132_3 "1K SMD0603" 0603R 125.4,26.5 r0 bottom value=1K (schematic designator R132)
R132_4 "1K SMD0603" 0603R 173.4,26.5 r0 bottom value=1K (schematic designator R132)
R132_5 "1K SMD0603" 0603R 221.4,26.5 r0 bottom value=1K (schematic designator R132)
R132_6 "1K SMD0603" 0603R 269.4,26.5 r0 bottom value=1K (schematic designator R132)
R132_7 "1K SMD0603" 0603R 317.4,26.5 r0 bottom value=1K (schematic designator R132)
R132_8 "1K SMD0603" 0603R 365.4,26.5 r0 bottom value=1K (schematic designator R132)
R133_1 "RQ73C2A1K0BTD 1K" RESC2012X50N 44,29.1 r90 top value=1K (schematic designator R133)
R133_2 "RQ73C2A1K0BTD 1K" RESC2012X50N 92,29.1 r90 top value=1K (schematic designator R133)
R133_3 "RQ73C2A1K0BTD 1K" RESC2012X50N 140,29.1 r90 top value=1K (schematic designator R133)
R133_4 "RQ73C2A1K0BTD 1K" RESC2012X50N 188,29.1 r90 top value=1K (schematic designator R133)
R133_5 "RQ73C2A1K0BTD 1K" RESC2012X50N 236,29.1 r90 top value=1K (schematic designator R133)
R133_6 "RQ73C2A1K0BTD 1K" RESC2012X50N 284,29.1 r90 top value=1K (schematic designator R133)
R133_7 "RQ73C2A1K0BTD 1K" RESC2012X50N 332,29.1 r90 top value=1K (schematic designator R133)
R133_8 "RQ73C2A1K0BTD 1K" RESC2012X50N 380,29.1 r90 top value=1K (schematic designator R133)
R134_1 "RQ73C2A1K0BTD 1K" RESC2012X50N 29.1,29 r180 top value=1K (schematic designator R134)
R134_2 "RQ73C2A1K0BTD 1K" RESC2012X50N 77.1,29 r180 top value=1K (schematic designator R134)
R134_3 "RQ73C2A1K0BTD 1K" RESC2012X50N 125.1,29 r180 top value=1K (schematic designator R134)
R134_4 "RQ73C2A1K0BTD 1K" RESC2012X50N 173.1,29 r180 top value=1K (schematic designator R134)
R134_5 "RQ73C2A1K0BTD 1K" RESC2012X50N 221.1,29 r180 top value=1K (schematic designator R134)
R134_6 "RQ73C2A1K0BTD 1K" RESC2012X50N 269.1,29 r180 top value=1K (schematic designator R134)
R134_7 "RQ73C2A1K0BTD 1K" RESC2012X50N 317.1,29 r180 top value=1K (schematic designator R134)
R134_8 "RQ73C2A1K0BTD 1K" RESC2012X50N 365.1,29 r180 top value=1K (schematic designator R134)
T1 "H5007NL" SOIC127P1600X551-24N 193.6,253.7 r90 top
T2 "Device" SOT-23 99.849,264.624 r180 top
TP1 "12V" TP2 285.6,258.1 r0 top value=OSC_TP
TP2 "3V3 MCU" TP2 230.193,228.35 r90 top value=OSC_TP
TP3 "3V3 AD7768" TP2 257.587,213.558 r90 top value=OSC_TP
TP4 "-12V" TP2 294.5,236.1 r270 top
TP5 "3V3 SDRAM" TP2 238.675,207.95 r90 top value=OSC_TP
TP6 "4V096 ref" TP2 230.499,184.907 r270 top value=OSC_TP
TP7 "+8V" TP2 278.2,214.9 r0 top value=OSC_TP
TP8 "0V195" TP2 230.229,189.987 r90 top value=OSC_TP
TP9 "-8V" TP2 304.892,214.9 r180 top value=OSC_TP
TP10 "5V AD7768" TP2 263.308,187.632 r270 top value=OSC_TP
TP11_1 "Current" TP2 24.5,77.32 r180 top (schematic designator TP11)
TP11_2 "Current" TP2 48.5,77.32 r180 top (schematic designator TP11)
TP11_3 "Current" TP2 72.5,77.32 r180 top (schematic designator TP11)
TP11_4 "Current" TP2 96.5,77.32 r180 top (schematic designator TP11)
TP11_5 "Current" TP2 120.5,77.32 r180 top (schematic designator TP11)
TP11_6 "Current" TP2 144.5,77.32 r180 top (schematic designator TP11)
TP11_7 "Current" TP2 168.5,77.32 r180 top (schematic designator TP11)
TP11_8 "Current" TP2 192.5,77.32 r180 top (schematic designator TP11)
TP11_9 "Current" TP2 216.5,77.32 r180 top (schematic designator TP11)
TP11_10 "Current" TP2 240.5,77.32 r180 top (schematic designator TP11)
TP11_11 "Current" TP2 264.5,77.32 r180 top (schematic designator TP11)
TP11_12 "Current" TP2 288.5,77.32 r180 top (schematic designator TP11)
TP11_13 "Current" TP2 312.5,77.32 r180 top (schematic designator TP11)
TP11_14 "Current" TP2 336.5,77.32 r180 top (schematic designator TP11)
TP11_15 "Current" TP2 360.5,77.32 r180 top (schematic designator TP11)
TP11_16 "Current" TP2 384.5,77.32 r180 top (schematic designator TP11)
TP12_1 "VPt" TP2 54.5,16.55 r90 top (schematic designator TP12)
TP12_2 "VPt" TP2 102.5,16.55 r90 top (schematic designator TP12)
TP12_3 "VPt" TP2 150.5,16.55 r90 top (schematic designator TP12)
TP12_4 "VPt" TP2 198.5,16.55 r90 top (schematic designator TP12)
TP12_5 "VPt" TP2 246.5,16.55 r90 top (schematic designator TP12)
TP12_6 "VPt" TP2 294.5,16.55 r90 top (schematic designator TP12)
TP12_7 "VPt" TP2 342.5,16.55 r90 top (schematic designator TP12)
TP12_8 "VPt" TP2 390.5,16.55 r90 top (schematic designator TP12)
TP13_1 "VHall" TP2 24.4,16.55 r90 top (schematic designator TP13)
TP13_2 "VHall" TP2 72.4,16.55 r90 top (schematic designator TP13)
TP13_3 "VHall" TP2 120.4,16.55 r90 top (schematic designator TP13)
TP13_4 "VHall" TP2 168.4,16.55 r90 top (schematic designator TP13)